# Altium PCB DriverModule.PcbDoc
Units mm, origin at the board's own origin, x right, y up, seen from the top; angles counter-clockwise.
Board outline 89 x 87 mm, 2 copper layers (Top Layer, Bottom Layer); 50 components, 37 nets, 152 pads, 8 vias.
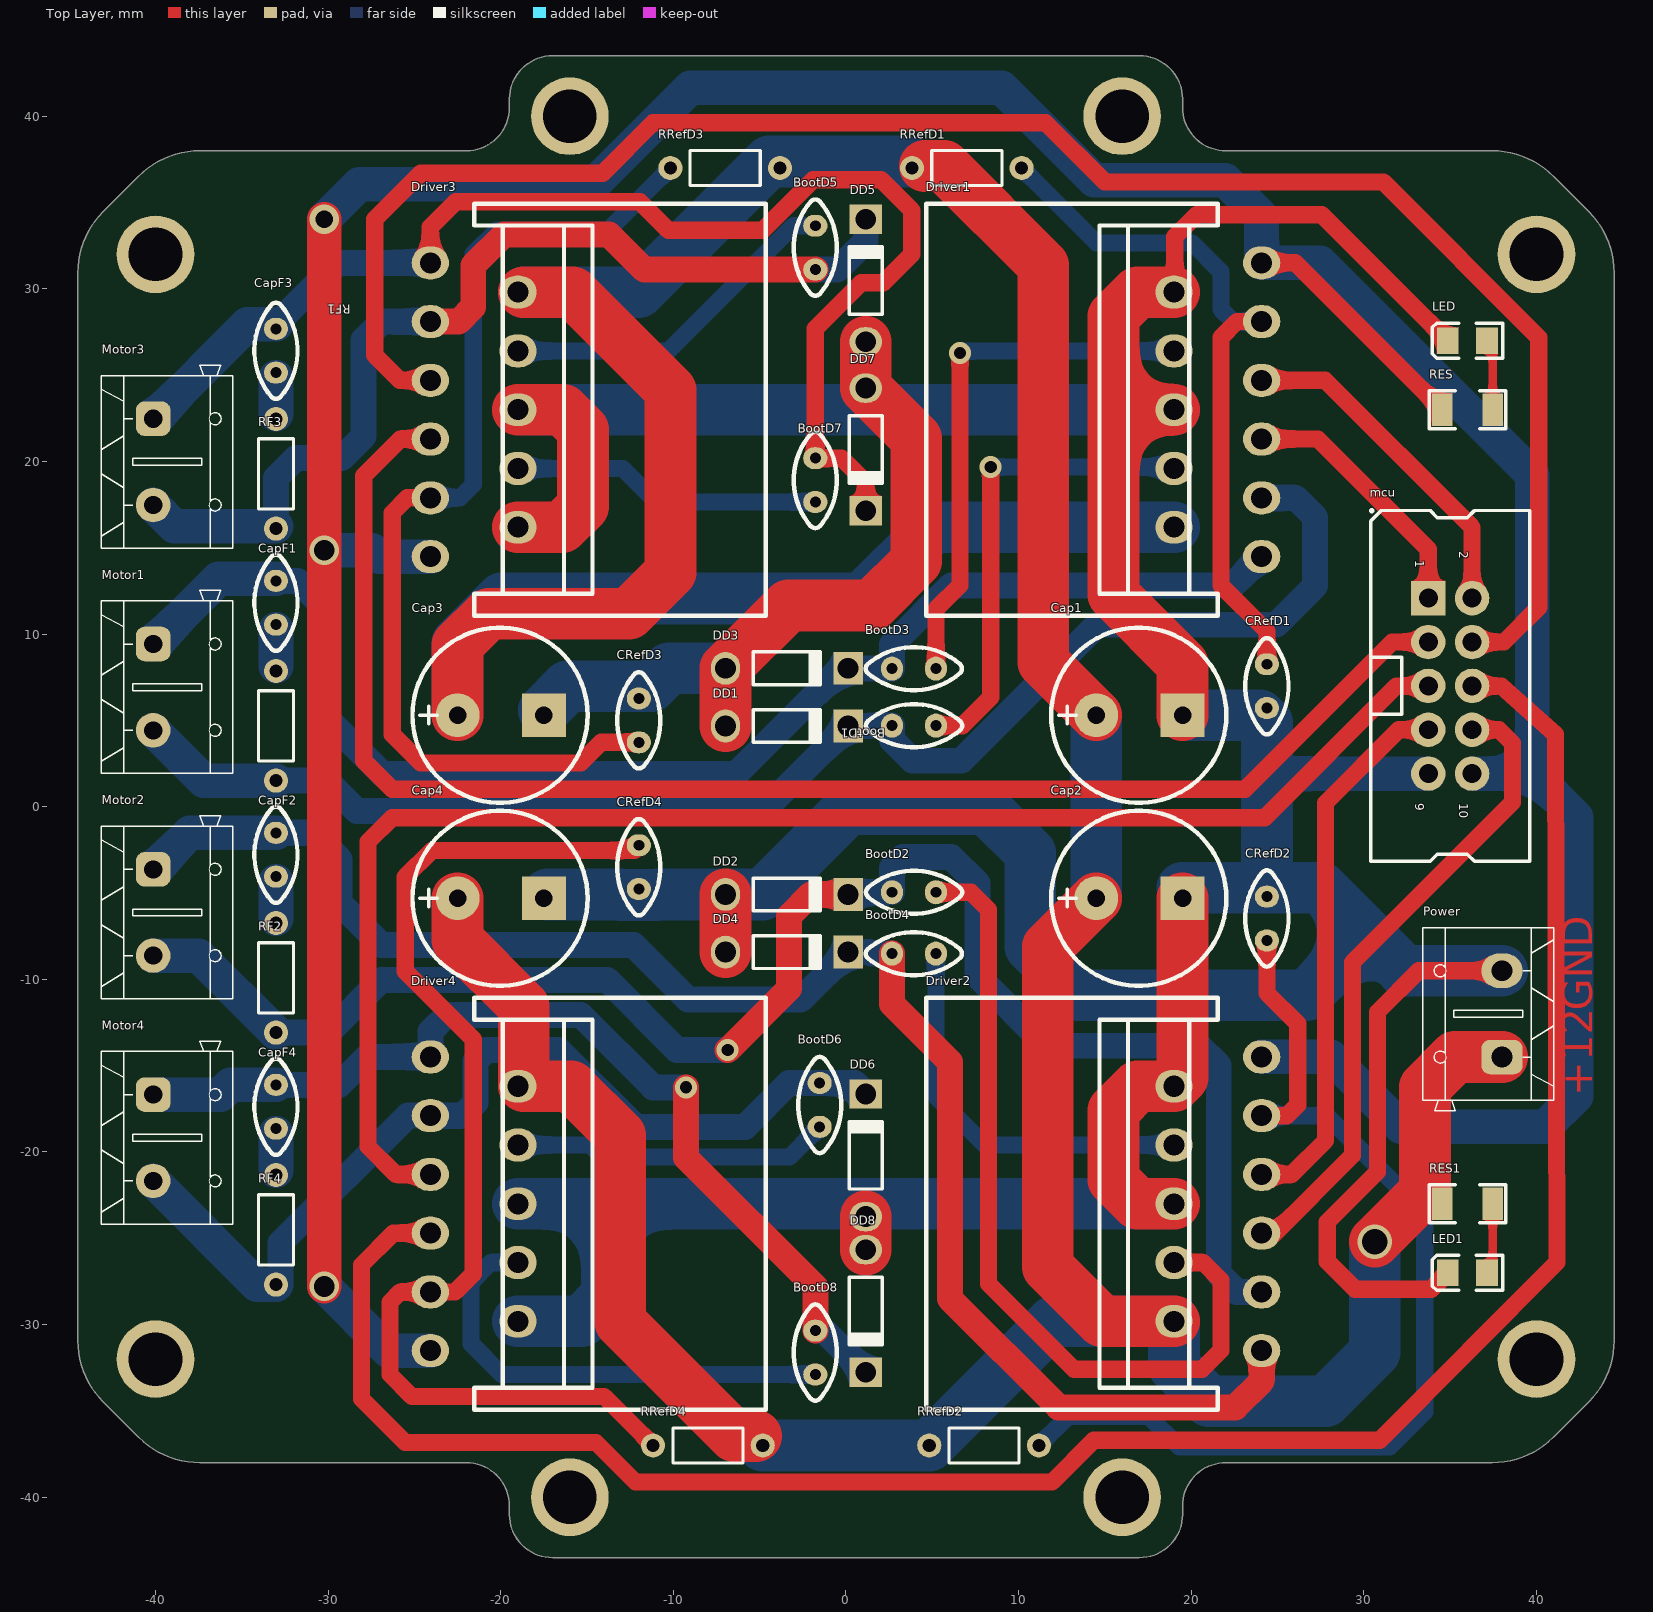
[diagram p0: Top Layer view]
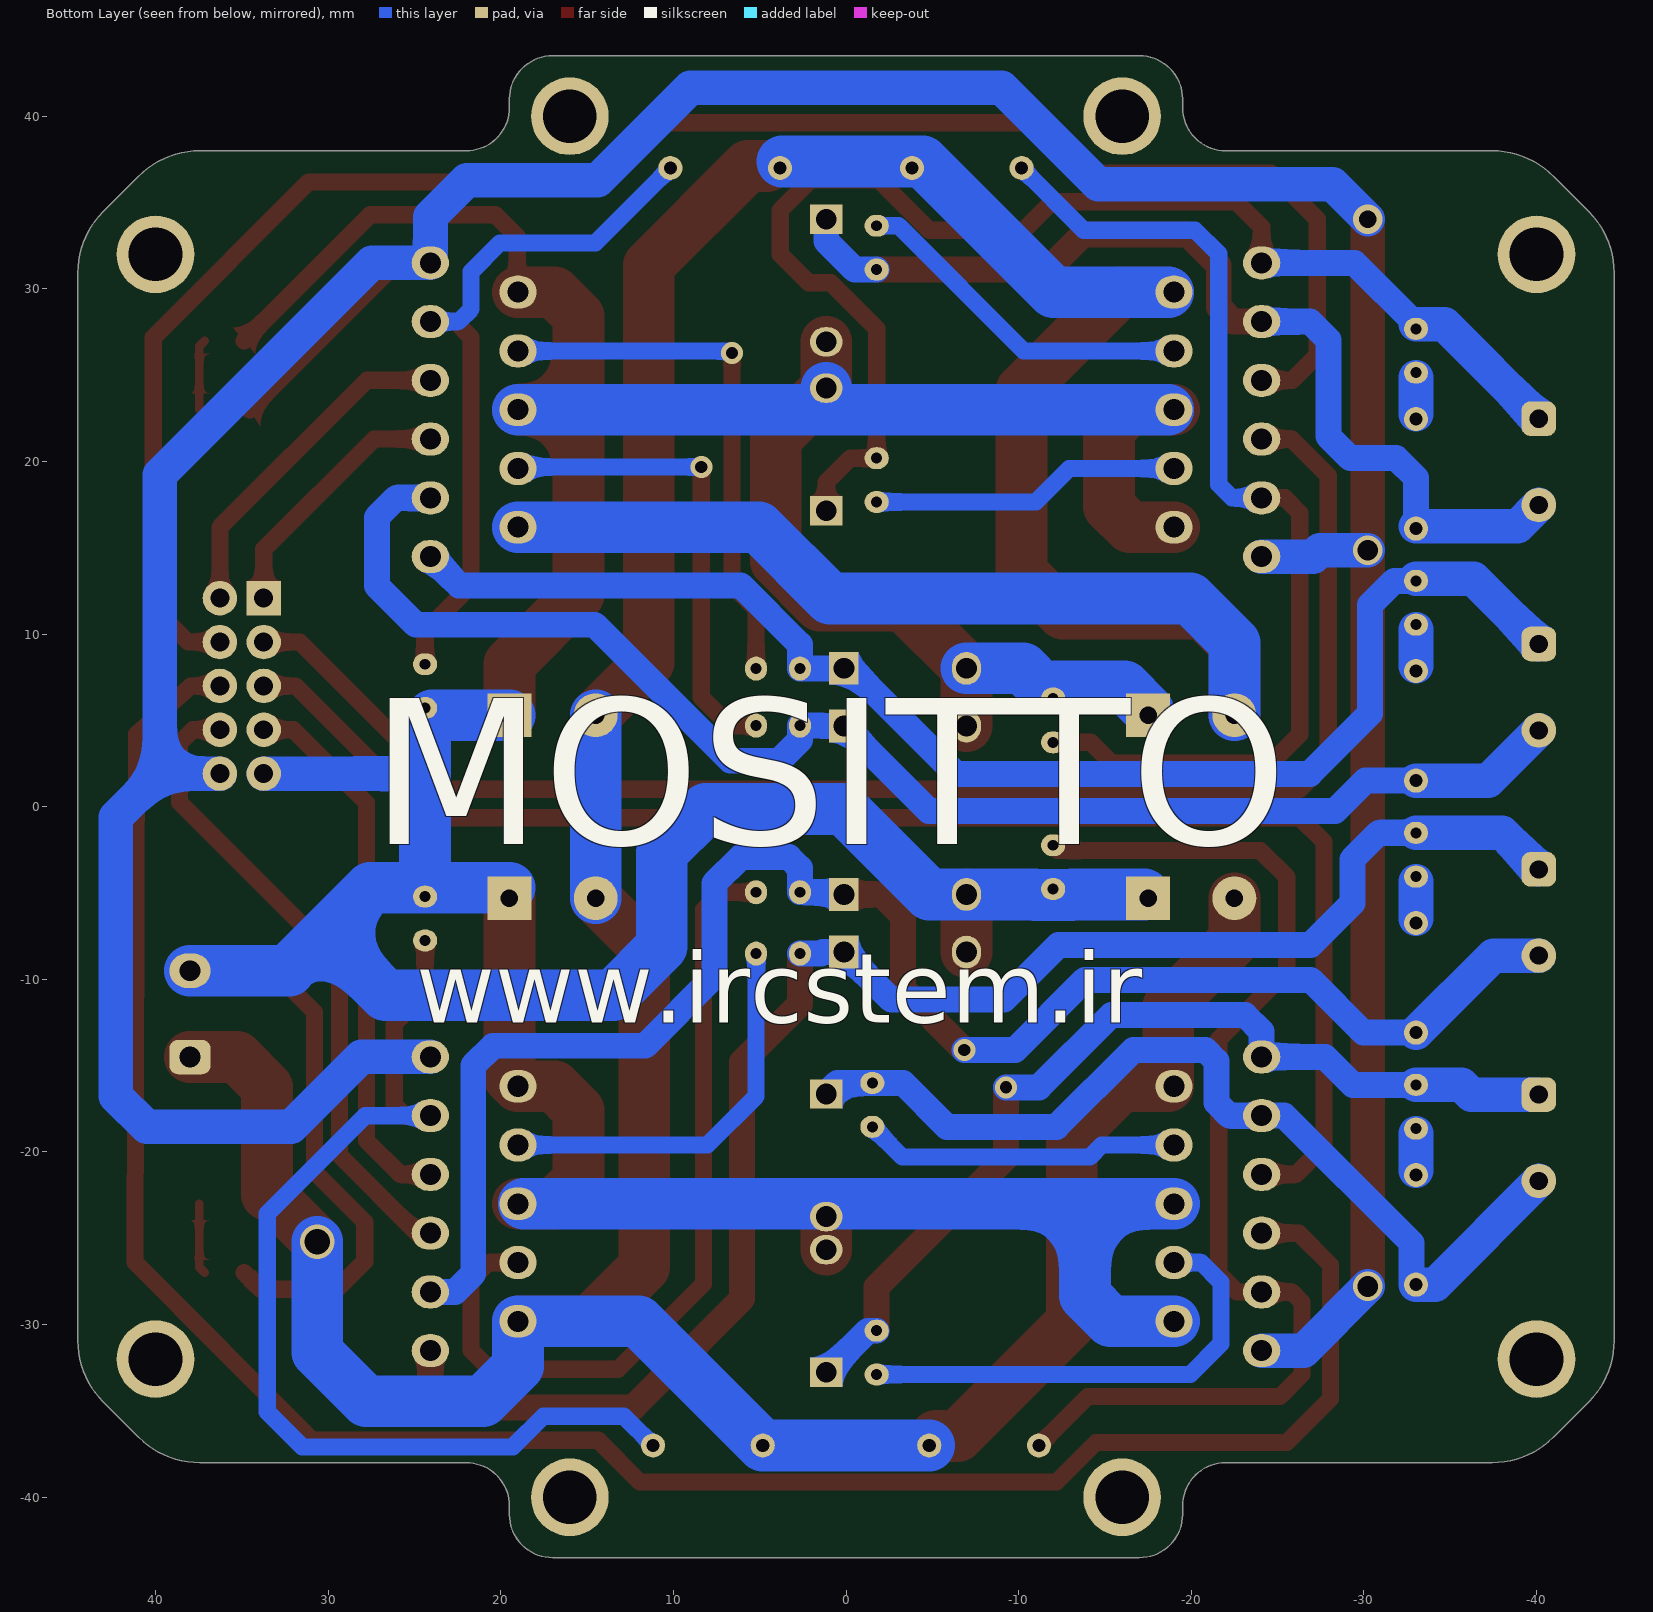
[diagram p1: Bottom Layer view, seen from below]
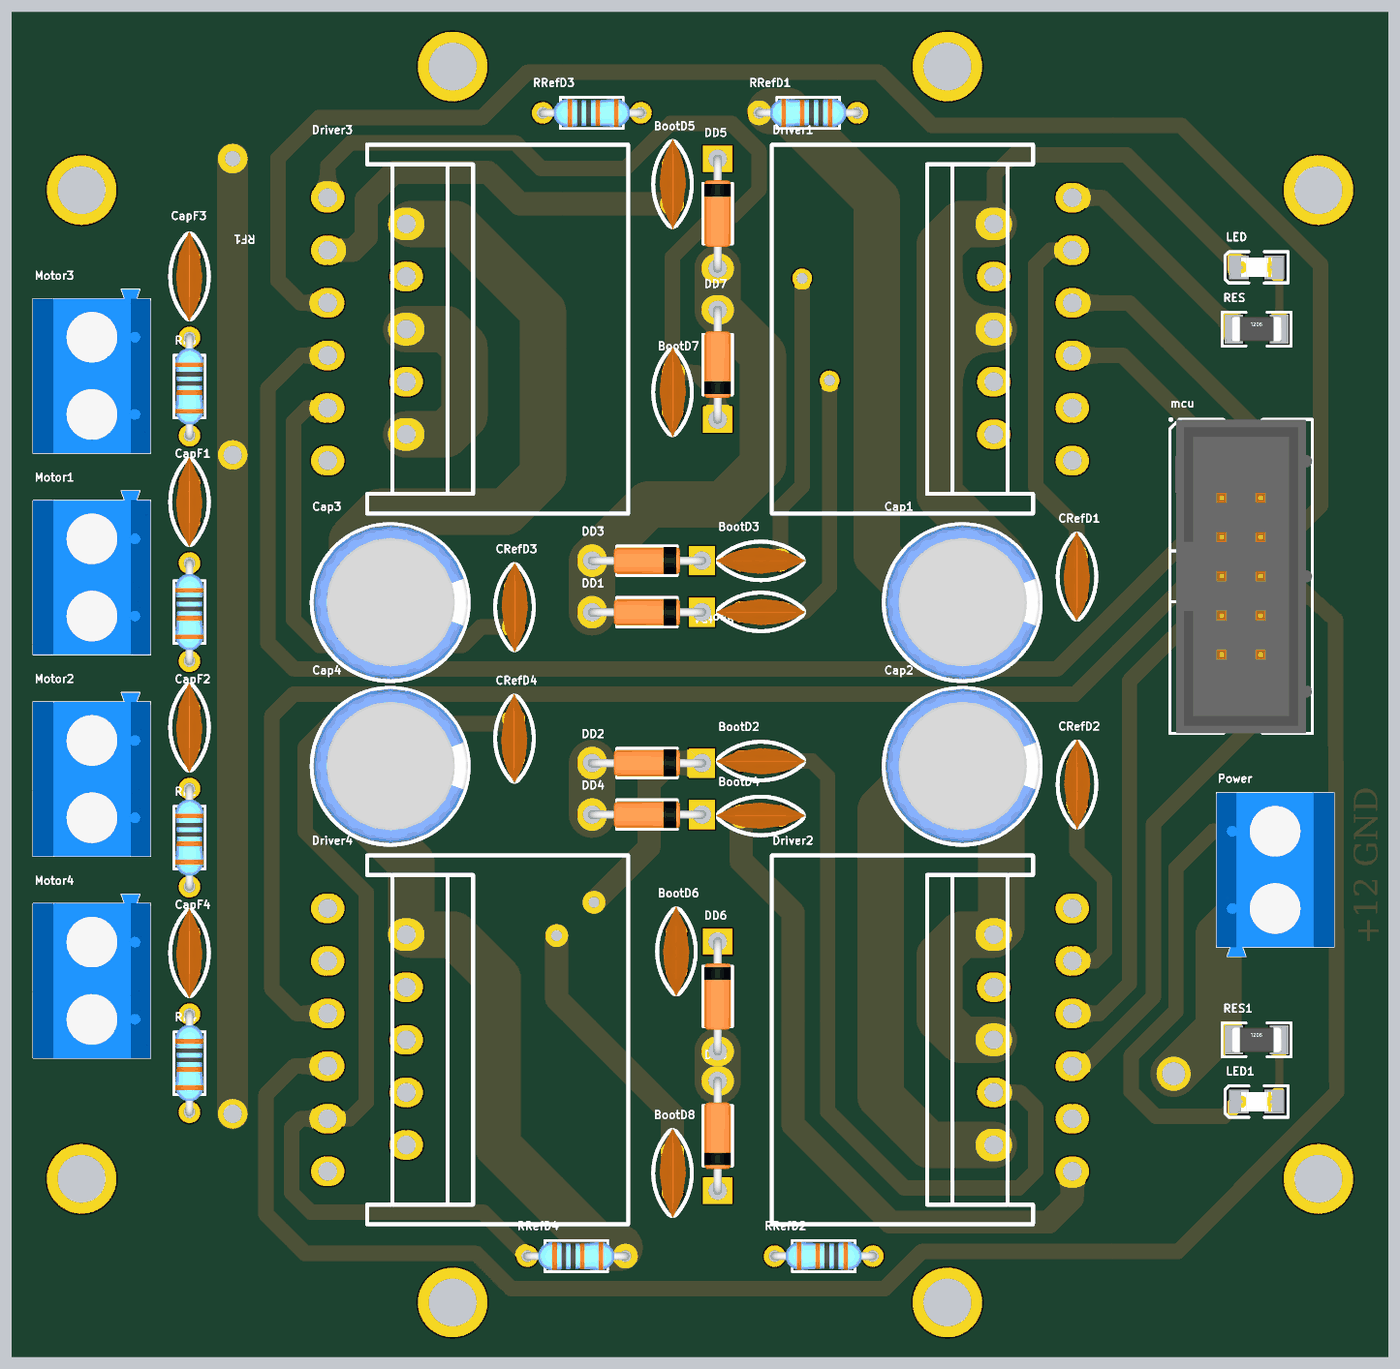
[diagram p2: 3D render of the assembled board from above, using the file's embedded part models]

## Layer stack, top to bottom
Top Solder: solder mask 0.0102, Solder Resist, Dk 3.5
Top Layer: signal copper 0.0356
Dielectric 1: dielectric 0.32, FR-4, Dk 4.8
Bottom Layer: signal copper 0.0356
Bottom Solder: solder mask 0.0102, Solder Resist, Dk 3.5

## Board outline
-43.036,-34.464 cw(c-39.5,-30.929) -44.5,-30.929 -44.5,30.929 cw(c-39.5,30.929) -43.036,34.464 -40.964,36.536 cw(c-37.429,33) -37.429,38 -22,38 ccw(c-22,40.5) -19.5,40.5 -19.5,41 cw(c-17,41) -17,43.5 17,43.5 cw(c17,41) 19.5,41 19.5,40.5 ccw(c22,40.5) 22,38 37.429,38 cw(c37.429,33) 40.964,36.536 43.036,34.464 cw(c39.5,30.929) 44.5,30.929 44.5,-30.929 cw(c39.5,-30.929) 43.036,-34.464 40.964,-36.536 cw(c37.429,-33) 37.429,-38 22,-38 ccw(c22,-40.5) 19.5,-40.5 19.5,-41 cw(c17,-41) 17,-43.5 -17,-43.5 cw(c-17,-41) -19.5,-41 -19.5,-40.5 ccw(c-22,-40.5) -22,-38 -37.429,-38 cw(c-37.429,-33) -40.964,-36.536

## Design rules (kind name [scope] priority, off if disabled: settings)
Clearance [All] p1: gap=0.254 ignorepadtopadclearanceinfootprint=FALSE except(0: Arc-Hole Track-Hole SMDPad-Hole THPad-Hole Via-Hole Fill-Hole Poly-Hole Region-Hole Text-Hole)
PolygonConnect [All] p1: connectstyle=Relief reliefconductorwidth=0.254 reliefentries=4 polygonreliefangle="90 Angle" airgapwidth=0.254
RoutingVias [All] p1: holewidth=0.711 width=1.27 viastyle="Through Hole" minholewidth=0.711 minwidth=1.27 maxholewidth=0.711 maxwidth=1.27
SolderMaskExpansion [All] p1: expansion=0.102
Width "Schematic Width Constraint_8" [InNet('NetBootD8_2')] p1: maxlimit=3 minlimit=1.5 preferedwidth=1.5 minimp=50.000000 maximp=50.000000 favimp=50.000000
Width "Schematic Width Constraint_7" [InNet('NetBootD2_1')] p2: maxlimit=3 minlimit=1.5 preferedwidth=1.5 minimp=50.000000 maximp=50.000000 favimp=50.000000
Width "Schematic Width Constraint_6" [InNet('NetBootD1_1')] p3: maxlimit=3 minlimit=1.5 preferedwidth=1.5 minimp=50.000000 maximp=50.000000 favimp=50.000000
Width "Schematic Width Constraint_17" [InNet('NetBootD5_1')] p4: maxlimit=3 minlimit=1.5 preferedwidth=1.5 minimp=50.000000 maximp=50.000000 favimp=50.000000
Width "Schematic Width Constraint_15" [InNet('NetBootD6_1')] p5: maxlimit=3 minlimit=1.5 preferedwidth=1.5 minimp=50.000000 maximp=50.000000 favimp=50.000000
Width "Schematic Width Constraint_13" [InNet('NetBootD4_2')] p6: maxlimit=3 minlimit=1.5 preferedwidth=1.5 minimp=50.000000 maximp=50.000000 favimp=50.000000
Width "Schematic Width Constraint_12" [InNet('NetBootD3_2')] p7: maxlimit=3 minlimit=1.5 preferedwidth=1.5 minimp=50.000000 maximp=50.000000 favimp=50.000000
Width "Schematic Width Constraint_2" [InNet('GND')] p8: maxlimit=4 minlimit=1 preferedwidth=3 minimp=50.000000 maximp=50.000000 favimp=50.000000
Width "Schematic Width Constraint_1" [InNet('15v')] p9: maxlimit=4 minlimit=2 preferedwidth=3 minimp=50.000000 maximp=50.000000 favimp=50.000000
Width "Schematic Width Constraint" [InNet('VCC')] p10: maxlimit=3 minlimit=1 preferedwidth=2 minimp=50.000000 maximp=50.000000 favimp=50.000000
Width [All] p11: maxlimit=2 minlimit=0.5 preferedwidth=1 minimp=50.000000 maximp=50.000000 favimp=50.000000
30 further rules are at their usual default settings.

## Components (designator, comment, footprint, x,y, rotation, side; value= is the part's Value field where it differs from the comment)
BootD1 "15nF" "Cap - 100nF" 3.937,4.699 r0 top
BootD2 "15nF" "Cap - 100nF" 3.937,-4.953 r0 top
BootD3 "15nF" "Cap - 100nF" 3.937,8.001 r180 top
BootD4 "15nF" "Cap - 100nF" 3.937,-8.509 r180 top
BootD5 "15nF" "Cap - 100nF" -1.778,32.385 r90 top
BootD6 "15nF" "Cap - 100nF" -1.524,-17.272 r270 top
BootD7 "15nF" "Cap - 100nF" -1.778,18.923 r90 top
BootD8 "15nF" "Cap - 100nF" -1.778,-31.623 r90 top
Cap1 "1000nF" C2200UF-10V_10*16 17,5.3 r180 top
Cap2 "1000nF" C2200UF-10V_10*16 17,-5.3 r180 top
Cap3 "1000nF" C2200UF-10V_10*16 -20,5.3 r180 top
Cap4 "1000nF" C2200UF-10V_10*16 -20,-5.3 r180 top
CapF1 "22nF" "Cap - 100nF" -33.02,11.818 r270 top
CapF2 "22nF" "Cap - 100nF" -33.02,-2.78 r270 top
CapF3 "22nF" "Cap - 100nF" -33.02,26.416 r270 top
CapF4 "22nF" "Cap - 100nF" -33.02,-17.378 r270 top
CRefD1 "220nF" "Cap - 100nF" 24.384,6.985 r270 top
CRefD2 "220nF" "Cap - 100nF" 24.384,-6.477 r90 top
CRefD3 "220nF" "Cap - 100nF" -12,5 r90 top
CRefD4 "220nF" "Cap - 100nF" -12,-3.5 r270 top
DD1 "1N5822" DIODE -3.429,4.678 r0 top
DD2 "1N5822" DIODE -3.429,-5.082 r0 top
DD3 "1N5822" DIODE -3.429,8.017 r0 top
DD4 "1N5822" DIODE -3.429,-8.421 r0 top
DD5 "1N5822" DIODE 1.143,30.48 r90 top
DD6 "1N5822" DIODE 1.143,-20.193 r90 top
DD7 "1N5822" DIODE 1.143,20.701 r270 top
DD8 "1N5822" DIODE 1.143,-29.21 r270 top
Driver1 "L6203" L6203 19,23 r90 top locked
Driver2 "L6203" L6203 19,-23 r90 top locked
Driver3 "L6203" L6203 -19,23 r270 top locked
Driver4 "L6203" L6203 -19,-23 r270 top locked
LED "LED-SMD" "0805 LED" 36,27 r180 top
LED1 "LED-SMD" "0805 LED" 36,-27 r180 top
mcu "CONNECTOR_IDC_5X2" IDC2.54-10PIN 35,7 r270 top
Motor1 "KF301_Terminal" "KF301 2PIN"#1 -40.132,6.927 r270 top
Motor2 "KF301_Terminal" "KF301 2PIN"#1 -40.132,-6.125 r270 top
Motor3 "KF301_Terminal" "KF301 2PIN"#1 -40.132,19.979 r270 top
Motor4 "KF301_Terminal" "KF301 2PIN"#1 -40.132,-19.177 r270 top
Power "KF301_Terminal" "KF301 2PIN"#2 38,-12 r90 top
RES "1k" 1206 36,23 r0 top
RES1 "1k" 1206 36,-23 r0 top
RF1 "10" Res-(1/4) -33.02,4.685 r270 top
RF2 "10" Res-(1/4) -33.02,-9.913 r270 top
RF3 "10" Res-(1/4) -33.02,19.283 r270 top
RF4 "10" Res-(1/4) -33.02,-24.511 r270 top
RRefD1 "150" Res-(1/4) 7,37 r180 top
RRefD2 "150" Res-(1/4) 8,-37 r180 top
RRefD3 "150" Res-(1/4) -7,37 r0 top
RRefD4 "150" Res-(1/4) -8,-37 r0 top

## Footprints (in the part's own frame and the unit in brackets; to place one, negate y for a bottom-side part, rotate by r counter-clockwise, add the part's x,y. Pads: shape width x height; smd on the part's side, far side on the other; paste and mask are expansions set on the pad)
"0805 LED" [mil]
  rect 50x60 smd: 1(-45,0) 2(45,0)
  silkscreen extent -80,-40 80,40, body extent -39,-25 39,25, height 32
1206 [mm]
  rect 1.2x1.9 smd: 1(-1.46,0) 2(1.46,0)
  silkscreen extent -2.22,-1.09 2.22,1.09, body extent -1.59,-0.8 1.61,0.8, height 1
C2200UF-10V_10*16 [mm]
  round 2.54 hole 1.016: 1(2.5,0)
  rect 2.54x2.54 hole 1.016: 2(-2.5,0)
  silkscreen extent -5.04,-5.07 5.12,5.07, body extent -4.98,-5.03 5.02,4.97, height 19.99
"Cap - 100nF" [mil]
  oval 50x55 hole 25: 1(-50,0) 2(50,0)
  silkscreen extent -110,-49 110,49, body extent -115,-34 115,33, height 272
DIODE [mm]
  oval 1.7x1.9 hole 1.2: 1(-3.55,0)
  rect 1.7x1.9 hole 1.2: 2(3.55,0)
  silkscreen extent -1.95,-0.95 2.05,0.95, body extent -3.82,-0.87 3.82,0.87, height 1.89
IDC2.54-10PIN [mm] "Connector; IDC, Low Profile Male Header, Thru-Hole; 10 Position; Vertical; Pitch 2.54 mm; 20.32 x 9.2 x 9.45 mm (LxWxH) DESIGNER : ABBAS BASEREH"
  rect 2x2 hole 1.1: 1(-5.08,-1.27)
  round 2 hole 1.1: 2(-5.08,1.27) 3(-2.54,-1.27) 4(-2.54,1.27) 5(0,-1.27) 6(0,1.27) 7(2.54,-1.27) 8(2.54,1.27) 9(5.08,-1.27) 10(5.08,1.27)
  silkscreen extent -10.16,-4.6 10.16,4.6, body extent -10.15,-4.25 10.15,4.6, height 9.17
"KF301 2PIN"#1 [mm] "Designer Abbas Basereh"
  rrect50% 2x2 hole 1.05: 1(-2.5,0)
  round 2 hole 1.05: 2(2.5,0)
  silkscreen extent -5.6,-3 5,4.6, body extent -5.6,-3 5,4.6, height 10
"KF301 2PIN"#2 [mm] "Designer Abbas Basereh"
  rrect50% 2x2.4 hole 1.2: 1(-2.5,0)
  oval 2x2.4 hole 1.2: 2(2.5,0)
  silkscreen extent -5.6,-3 5,4.6, body extent -5.6,-3 5,4.6, height 10
L6203 [mil]
  oval 75x85 hole 48: 1(-335,-200) 2(-268,0) 3(-201,-200) 4(-134,0) 5(-67,-200) 6(0,0) 7(67,-200) 8(134,0) 9(201,-200) 10(268,0) 11(335,-200)
  silkscreen extent -470,-100 470,565, body extent -474,-211 470,565, height 787
Res-(1/4) [mil]
  round 55 hole 30: 1(-125,0) 2(125,0)
  silkscreen extent -80,-40 80,40, body extent -135,-36 135,36, height 115

## Part data
BootD1 BootD2 BootD3 BootD4 BootD5 BootD6 BootD7 BootD8 CapF1 CapF2 CapF3 CapF4 CRefD1 CRefD2 CRefD3 CRefD4: library part CAPACITOR-SMD
Cap1 Cap2 Cap3 Cap4: library part CAPACITOR
DD1 DD2 DD3 DD4 DD5 DD6 DD7 DD8: library part "Diode 1N4148", "High Conductance Fast Diode", Code_JEDEC=DO-204-AH, ComponentLink1Description="Manufacturer Link", ComponentLink1URL=http://www.fairchildsemi.com/, ComponentLink2Description=Datasheet, ComponentLink2URL=http://www.fairchildsemi.com/ds/1N%2F1N4148.pdf, DatasheetVersion=1997, LatestRevisionDate=17-Jul-2002, LatestRevisionNote="Re-released for DXP Platform.", PackageDescription="Diode, Axial; Body 3.8 x 1.9 mm (LxDia. max), Lead Dia. 0.53 mm (max)", PackageReference=DO-35, Published=8-Jun-2000, Publisher="Altium Limited"
Driver1 Driver2 Driver3 Driver4: "DMOS FULL BRIDGE DRIVER", Adding Date=1387/01/08, Company=ControTEK, Designer="Saeid Jorablo"
mcu: library part "IDC 5X2", "IDC, 5-Pin, Dual row", Manufacturer=CHINA, Max Current=mA, Category=Connector, ComponentLink1Description=Datasheet, ComponentLink2Description=Reference, Connector type="IDC5X2  PROGPIN", Designer="ABBAS BASEREH", LatestRevisionDate=1395-11-17, Mounting Technology=Through-Hole, Pin Count=10, Publisher="ABBAS BASEREH", Status=Unreleased, Update=2017-2-4
Motor1 Motor2 Motor3 Motor4 Power: library part KF301-2Pin_Terminal, "Terminal 2 Pin 250VAC 16A", Designer="Abbas Basereh", Link=https://www.aliexpress.com/item/, Part. No="KF301 2P"
RES RES1 RF1 RF2 RF3 RF4 RRefD1 RRefD2 RRefD3 RRefD4: library part RESISTOR

## Free pads (board coordinates)
  round 4.5 hole 3.1: ""(-40,-32) ""(-40,32) ""(-16,-40) ""(-16,40) ""(16,-40) ""(16,40) ""(40,-32) ""(40,32)

## Via types
v1: diameter 1.27, hole 0.711, Top Layer to Bottom Layer, 4 vias
v2: diameter 1.7, hole 1.2, Top Layer to Bottom Layer, 2 vias
v3: diameter 2, hole 1.5, Top Layer to Bottom Layer, 1 vias
v4: diameter 1.7, hole 1, Top Layer to Bottom Layer, 1 vias

## Nets (pads, with @x,y where several pads share a name; then routed paths per layer and width w, separated by ;. In a path a pad name is that pad's centre, name@x,y a point inside that pad or via, vN(x,y) a via of type N, cw(c..) or ccw(c..) an arc to the next point about the centre after c; other vN are vias at no path point)
15v: Cap1.1 Cap2.1 Cap3.1 Cap4.1 Driver1.2 Driver2.2 Driver3.2 Driver4.2 Power.1 RES1.1 RRefD1.2 RRefD2.2 RRefD3.2 RRefD4.2 | length 297.4
  Top Layer w3: Cap4.1 -22.5,-7.726 -18.669,-11.557 -18.669,-16.193 -15.938,-16.193 -13.081,-19.05 -13.081,-29.845 -6.477,-36.449 RRefD4.2@-5.207,-36.449 ; Cap3.1 -22.5,9.377 -20.701,11.176 -12.573,11.176 -10.16,13.589 -10.16,24.13 -15.837,29.807 Driver3.2@-18.669,29.807 ; 4.572,37.116 5.683,37.116 11.43,31.369 11.43,8.37 Cap1.1 ; Cap2.1 11.684,-8.116 11.684,-26.658 14.834,-29.807 Driver2.2 ; v3(30.632,-25.197) 33.35,-22.479 33.539,-22.479 33.539,-16.245 35.284,-14.5 Power.1
  Bottom Layer w3: Cap3.1 -22.5,9.504 -19.939,12.065 0.921,12.065 5.049,16.193 Driver1.2 ; Driver3.2@-18.669,29.807 -12.018,29.807 -4.444,37.381 RRefD1.2@3.698,37.381 ; RRefD4.2 RRefD2.2 12.018,-29.807 Driver2.2 19,-32.411 21.026,-34.437 27.793,-34.437 30.632,-31.598 v3(30.632,-25.197) ; Cap2.1 Cap1.1
Chap1D: Driver3.5 mcu.4 | length 106.9
  Top Layer w1: Driver3.5 -25.845,24.702 -27.305,26.162 -27.305,34.036 -24.638,36.703 -14.097,36.703 -11.176,39.624 11.557,39.624 14.986,36.195 31.115,36.195 40.132,27.178 40.132,11.557 38.115,9.54 mcu.4
Chap1P: Driver3.7 mcu.3 | length 87.1
  Top Layer w1: Driver3.7 -25.819,21.298 -27.94,19.177 -27.94,2.667 -26.289,1.016 23.114,1.016 31.638,9.54 mcu.3
Chap2D: Driver1.7 mcu.2 | length 19.8
  Top Layer w1: Driver1.7 27.749,24.702 36.27,16.181 mcu.2
Chap2P: Driver1.5 mcu.1 | length 15.1
  Top Layer w1: Driver1.5 27.343,21.298 33.73,14.911 mcu.1
GND: Cap1.2 Cap2.2 Cap3.2 Cap4.2 CRefD1.2 CRefD2.2 CRefD3.2 CRefD4.2 DD1.1 DD2.1 DD3.1 DD4.1 DD5.1 DD6.1 DD7.1 DD8.1 Driver1.6 Driver1.10 Driver2.6 Driver2.10 Driver3.6 Driver3.10 Driver4.6 Driver4.10 LED1.2 LED.2 mcu.9 Power.2 | length 361.4
  Top Layer w1: Driver1.10@19.05,30.226 19.05,33.02 20.32,34.29 27.567,34.29 LED.2 ; LED1.2 33.906,-27.951 29.492,-27.951 27.878,-26.338 27.878,-24.056 30.785,-21.149 30.785,-11.886 33.172,-9.5 37.681,-9.5 Power.2@38,-9.819
  Top Layer w3: Driver3.10 -16.446,16.193 -15.24,17.399 -15.24,21.844 -16.396,23 Driver3.6 ; DD4.1 DD2.1 ; DD1.1 DD3.1 -3.337,11.659 1.499,11.659 4.064,14.224 4.064,21.33 DD7.1 DD5.1 ; DD8.1 DD6.1 ; Driver2.6 16.891,-23 15.494,-21.603 15.494,-17.59 16.891,-16.193 Driver2.10 19.5,-15.693 Cap2.2 ; Driver1.6 15.494,23 ; Driver1.10 16.891,29.807 15.494,28.41 15.494,23 ; Cap1.2 19.5,8.273 15.494,12.279 15.494,23
  Bottom Layer w2: 24.399,1.92 mcu.9
  Bottom Layer w3: Driver4.10 -15.329,-29.807 -13.843,-28.321 -13.843,-23 ; Driver4.6 -13.843,-23 ; Driver3.6@-18.669,23 1.143,23 ; Cap3.2@-17.5,5.588 -16.129,6.959 -16.129,6.985 -11.285,6.985 -10.253,8.017 DD3.1 ; Cap4.2@-17.272,-5.082 -13.09,-5.082 -13.053,-5.119 -10.947,-5.119 -10.91,-5.082 -4.828,-5.082 0.127,-0.127 8.128,-0.127 10.668,-2.667 10.668,-8.103 13.487,-10.922 26.67,-10.922 30.226,-7.366 ; DD7.1 1.143,23 ; Driver2.6@18.669,-23 -13.843,-23 ; Driver1.6 1.143,23 ; Cap2.2@19.5,-4.699 CRefD2.2@24.384,-4.699 ; Cap1.2 23.969,5.3 24.384,4.885 24.384,1.935 ; 24.399,1.92 24.384,1.935 ; Power.2 32.258,-9.5 32.258,-9.398 30.226,-7.366 ; CRefD2.2@24.384,-4.699 27.559,-4.699 30.226,-7.366 ; CRefD2.2@24.384,-4.699 24.384,1.935
NetBootD1_1: BootD1.1 DD1.2 Driver1.3 Motor1.2 RF1.2 | length 84.4
  Bottom Layer w1.5: RF1.2 -30.085,1.51 -28.321,-0.254 -4.811,-0.254 DD1.2 1.372,4.678 1.392,4.699 BootD1.1 2.667,3.861 3.861,2.667 6.68,2.667 14.554,10.541 24.917,10.541 27.178,12.802 27.178,16.764 26.047,17.895 Driver1.3
  Bottom Layer w2: Motor1.2 -37.215,1.51 RF1.2
NetBootD1_2: BootD1.2 Driver1.4 | length 27.9
  Top Layer w1: BootD1.2 6.731,4.699 8.382,6.35 v1(8.382,19.685)
  Bottom Layer w1: v1(8.382,19.685) 18.835,19.685 18.962,19.558 Driver1.4
NetBootD2_1: BootD2.1 DD2.2 Driver2.3 Motor2.2 RF2.2 | length 97.6
  Top Layer w1.5: v1(-6.858,-14.097) -3.302,-10.541 -3.302,-6.35 -2.034,-5.082 DD2.2
  Bottom Layer w1.5: RF2.2 -29.979,-13.088 -26.924,-10.033 -13.843,-10.033 -9.779,-14.097 v1(-6.858,-14.097) ; DD2.2 0.25,-4.953 BootD2.1 2.667,-3.556 3.302,-2.921 6.096,-2.921 7.62,-4.445 7.62,-9.83 11.633,-13.843 20.447,-13.843 21.59,-14.986 21.59,-27.051 22.644,-28.105 Driver2.3
  Bottom Layer w2: Motor2.2 -37.483,-8.625 RF2.2
NetBootD2_2: BootD2.2 Driver2.4 | length 48.3
  Top Layer w1: BootD2.2 7.239,-4.953 8.255,-5.969 8.255,-27.635 13.208,-32.588 20.625,-32.588 21.717,-31.496 21.717,-27.432 20.689,-26.404 Driver2.4
NetBootD3_1: BootD3.1 Driver1.8 | length 31.3
  Top Layer w1: BootD3.1 5.207,11.43 6.604,12.827 v1(6.604,26.289)
  Bottom Layer w1: v1(6.604,26.289) 6.719,26.404 Driver1.8
NetBootD3_2: BootD3.2 CapF1.1 DD3.2 Driver1.1 Motor1.1 | length 80.1
  Bottom Layer w1.5: CapF1.1 -31.757,13.088 -30.353,11.684 -30.353,5.385 -26.873,1.905 -6.35,1.905 -0.238,8.017 1.372,8.017 1.387,8.001 BootD3.2 2.667,9.398 6.096,12.827 22.416,12.827 Driver1.1
  Bottom Layer w2: Motor1.1 -36.351,13.208 CapF1.1@-33.02,13.208
NetBootD4_1: BootD4.1 Driver2.8 | length 23.2
  Bottom Layer w1: BootD4.1 5.207,-16.764 8.039,-19.596 Driver2.8
NetBootD4_2: BootD4.2 CapF2.1 DD4.2 Driver2.1 Motor2.1 | length 94.8
  Top Layer w1.5: BootD4.2 2.667,-11.43 6.02,-14.783 6.02,-28.499 12.319,-34.798 22.556,-34.798 24.08,-33.274 Driver2.1
  Bottom Layer w1.5: CapF2.1 -30.875,-1.51 -29.337,-3.048 -29.337,-5.588 -26.924,-8.001 -12.319,-8.001 -9.144,-11.176 -2.634,-11.176 DD4.2 1.346,-8.421 1.434,-8.509 BootD4.2
  Bottom Layer w2: Motor2.1 -38.017,-1.51 CapF2.1
NetBootD5_1: BootD5.1 DD5.2 Driver3.3 Motor3.2 RF3.2 | length 58
  Top Layer w1.5: Driver3.3 -22.441,28.105 -21.59,28.956 -21.59,31.369 -19.812,33.147 -13.716,33.147 -11.684,31.115 BootD5.1
  Bottom Layer w1.5: RF3.2 -33.02,16.256 -33.02,19.05 -31.877,20.193 -29.21,20.193 -27.94,21.463 -27.94,27.051 -26.886,28.105 Driver3.3 ; BootD5.1 -0.508,31.115 1.143,32.766 DD5.2
  Bottom Layer w2: Motor3.2 -38.909,16.256 RF3.2@-33.02,16.256
NetBootD5_2: BootD5.2 Driver3.4 | length 20.2
  Bottom Layer w1: Driver3.4 -10.299,26.404 -3.048,33.655 BootD5.2
NetBootD6_1: BootD6.1 DD6.2 Driver4.3 Motor4.2 RF4.2 | length 55.2
  Bottom Layer w1.5: RF4.2 -32.766,-27.432 -32.766,-25.273 -25.388,-17.895 Driver4.3 -22.213,-17.895 -21.463,-17.145 -21.463,-14.732 -20.828,-14.097 -16.637,-14.097 -12.192,-18.542 -5.842,-18.542 -3.302,-16.002 BootD6.1 0.502,-16.002 DD6.2
  Bottom Layer w2: Motor4.2 -34.123,-27.686 RF4.2
NetBootD6_2: BootD6.2 Driver4.4 | length 18.5
  Bottom Layer w1: Driver4.4 -14.821,-19.596 -14.122,-20.295 -3.277,-20.295 BootD6.2
NetBootD7_1: BootD7.1 Driver3.8 | length 18
  Bottom Layer w1: Driver3.8 -12.929,19.596 -10.985,17.653 BootD7.1
NetBootD7_2: BootD7.2 CapF3.1 DD7.2 Driver3.1 Motor3.1 | length 75.8
  Top Layer w1: Driver3.1 -24.08,33.578 -22.606,35.052 -11.938,35.052 -10.287,33.401 -4.826,33.401 -1.905,36.322 2.032,36.322 3.81,34.544 3.81,32.004 2.159,30.353 0.889,30.353 -1.778,27.686 BootD7.2 -0.254,20.193 1.143,18.796 DD7.2
  Bottom Layer w1: CapF3.1 CapF3.1@-33.02,27.94
  Bottom Layer w1.5: CapF3.1@-33.02,27.94 -29.451,31.509 Driver3.1
  Bottom Layer w2: Motor3.1 -34.671,27.94 CapF3.1@-33.02,27.94
NetBootD8_1: BootD8.1 Driver4.8 | length 27.4
  Bottom Layer w1: Driver4.8 -20.574,-26.404 -21.717,-27.547 -21.717,-31.115 -19.939,-32.893 BootD8.1
NetBootD8_2: BootD8.2 CapF4.1 DD8.2 Driver4.1 Motor4.1 | length 56.5
  Top Layer w1.5: v1(-9.271,-16.256) -9.271,-20.32 -1.778,-27.813 BootD8.2
  Bottom Layer w1.5: CapF4.1 -29.362,-16.108 -27.745,-14.491 Driver4.1 -24.08,-13.031 -23.114,-12.065 -15.367,-12.065 -11.176,-16.256 v1(-9.271,-16.256) ; BootD8.2 -1.264,-30.353 DD8.2
  Bottom Layer w2: Motor4.1 -36.235,-16.677 -35.666,-16.108 CapF4.1
NetCapF1_2: CapF1.2 RF1.1 | length 2.7
  Bottom Layer w1: RF1.1 RF1.1@-33.02,8.128 ; CapF1.2@-33.02,10.287 CapF1.2
  Bottom Layer w2: RF1.1@-33.02,8.128 CapF1.2@-33.02,10.287
NetCapF2_2: CapF2.2 RF2.1 | length 2.7
  Bottom Layer w1: RF2.1 RF2.1@-33.02,-6.477 ; CapF2.2@-33.02,-4.318 CapF2.2
  Bottom Layer w2: RF2.1@-33.02,-6.477 CapF2.2@-33.02,-4.318
NetCapF3_2: CapF3.2 RF3.1 | length 2.7
  Bottom Layer w1: RF3.1 RF3.1@-33.02,22.733 ; CapF3.2@-33.02,24.892 CapF3.2
  Bottom Layer w2: RF3.1@-33.02,22.733 CapF3.2@-33.02,24.892
NetCapF4_2: CapF4.2 RF4.1 | length 2.7
  Bottom Layer w1: RF4.1 RF4.1@-33.02,-21.082 ; CapF4.2@-33.02,-18.923 CapF4.2
  Bottom Layer w2: RF4.1@-33.02,-21.082 CapF4.2@-33.02,-18.923
NetCRefD1_1: CRefD1.1 Driver1.9 RRefD1.1 | length 41.6
  Top Layer w1: Driver1.9 22.644,28.105 21.717,27.178 21.717,12.827 24.384,10.16 CRefD1.1
  Bottom Layer w1: RRefD1.1 14.512,32.663 20.042,32.663 21.717,30.988 21.717,28.829 22.441,28.105 Driver1.9
NetCRefD2_1: CRefD2.1 Driver2.9 RRefD2.1 | length 60.5
  Top Layer w1: Driver2.9 25.539,-17.895 26.162,-17.272 26.162,-12.573 24.384,-10.795 CRefD2.1
  Bottom Layer w1: RRefD2.1 12.869,-35.306 17.526,-35.306 19.304,-37.084 31.496,-37.084 33.528,-35.052 33.528,-23.571 27.851,-17.895 Driver2.9
NetCRefD3_1: CRefD3.1 Driver3.9 RRefD3.1 | length 60.5
  Top Layer w1: Driver3.9 -25.412,17.895 -26.289,17.018 -26.289,4.191 -24.638,2.54 -15.367,2.54 -14.177,3.73 CRefD3.1
  Bottom Layer w1: Driver3.9 -22.364,17.895 -21.59,18.669 -21.59,32.029 -20.218,33.401 -13.774,33.401 RRefD3.1
NetCRefD4_1: CRefD4.1 Driver4.9 RRefD4.1 | length 65.5
  Top Layer w1: CRefD4.1@-12,-2.286 -12.254,-2.54 -24.003,-2.54 -25.527,-4.064 -25.527,-9.525 -21.59,-13.462 -21.59,-27.051 -22.644,-28.105 -25.819,-28.105 -26.416,-28.702 -26.416,-32.893 -25.146,-34.163 -14.012,-34.163 RRefD4.1
NetLED1_1: LED1.1 RES1.2 | length 4.1
  Top Layer w0.5: LED1.1 37.46,-26.682 RES1.2
NetLED_1: LED.1 RES.2 | length 4.1
  Top Layer w0.5: LED.1 37.46,26.682 RES.2
Rast1D: Driver2.5 mcu.8 | length 37.5
  Top Layer w1: Driver2.5 24.828,-24.702 29.337,-20.193 29.337,-9.017 38.608,0.254 38.608,3.683 37.831,4.46 mcu.8
Rast1P: Driver2.7 mcu.7 | length 31.8
  Top Layer w1: Driver2.7 25.819,-21.298 27.777,-19.34 27.777,0.218 32.019,4.46 mcu.7
Rast2D: Driver4.7 mcu.6 | length 125.5
  Top Layer w1: Driver4.7 -26.226,-24.702 -28.067,-26.543 -28.067,-34.29 -25.527,-36.83 -14.478,-36.83 -12.192,-39.116 11.938,-39.116 14.351,-36.703 30.924,-36.703 41.188,-26.38 41.1,4.192 37.958,7 mcu.6
Rast2P: Driver4.5 mcu.5 | length 87.1
  Top Layer w1: Driver4.5 -26.073,-21.298 -27.686,-19.685 -27.686,-2.032 -26.289,-0.635 24.257,-0.635 31.892,7 mcu.5
VCC: Driver1.11 Driver2.11 Driver3.11 Driver4.11 mcu.10 RES.1 | length 234.9
  Top Layer w1: Driver1.11 26.022,31.509 RES.1@34.535,22.996
  Top Layer w2: v2(-30.226,-27.788) v2(-30.226,14.859) v4(-30.226,34.036)
  Bottom Layer w2: v2(-30.226,-27.788) -26.505,-31.509 Driver4.11 ; v2(-30.226,14.859) -27.432,14.859 -27.064,14.491 Driver3.11 ; v4(-30.226,34.036) -28.194,36.068 -14.605,36.068 -9.017,41.656 9.017,41.656 14.376,36.297 21.971,36.297 24.08,34.188 Driver1.11 27.47,31.509 39.751,19.228 39.751,1.92 ; Driver2.11 28.08,-14.491 32.131,-18.542 40.513,-18.542 42.291,-16.764 42.291,-0.62 39.751,1.92 ; mcu.10 39.751,1.92

## Other copper
Top Layer:
  text "GND" at 43.815,-11.811 h3 r90
  text "+12" at 43.815,-16.764 h3 r90

## Silkscreen, mask and mechanical layers (free items; w line width, h text height)
Bottom Overlay:
  text "MOSITTO" at 27.559,-5.207 h16
  text "www.ircstem.ir" at 24.892,-13.843 h7
Mechanical 1:
  the board outline again, w0.013

## Text inside footprints (layer, text, board x,y; h text height)
mcu: Top Overlay "2" at 35.52,14.788 h0.5 r270; Top Overlay "1" at 32.98,14.288 h0.5 r270; Top Overlay "10" at 35.52,0.212 h0.5 r270; Top Overlay "9" at 32.98,0.212 h0.5 r270